# Altium PCB PCB.PcbDoc
Units mm, origin at the board's own origin, x right, y up, seen from the top; angles counter-clockwise.
Board outline 75 x 40 mm, 2 copper layers (Top Layer, Bottom Layer), stack 1.236 mm thick; 47 components, 41 nets, 179 pads, 72 vias.
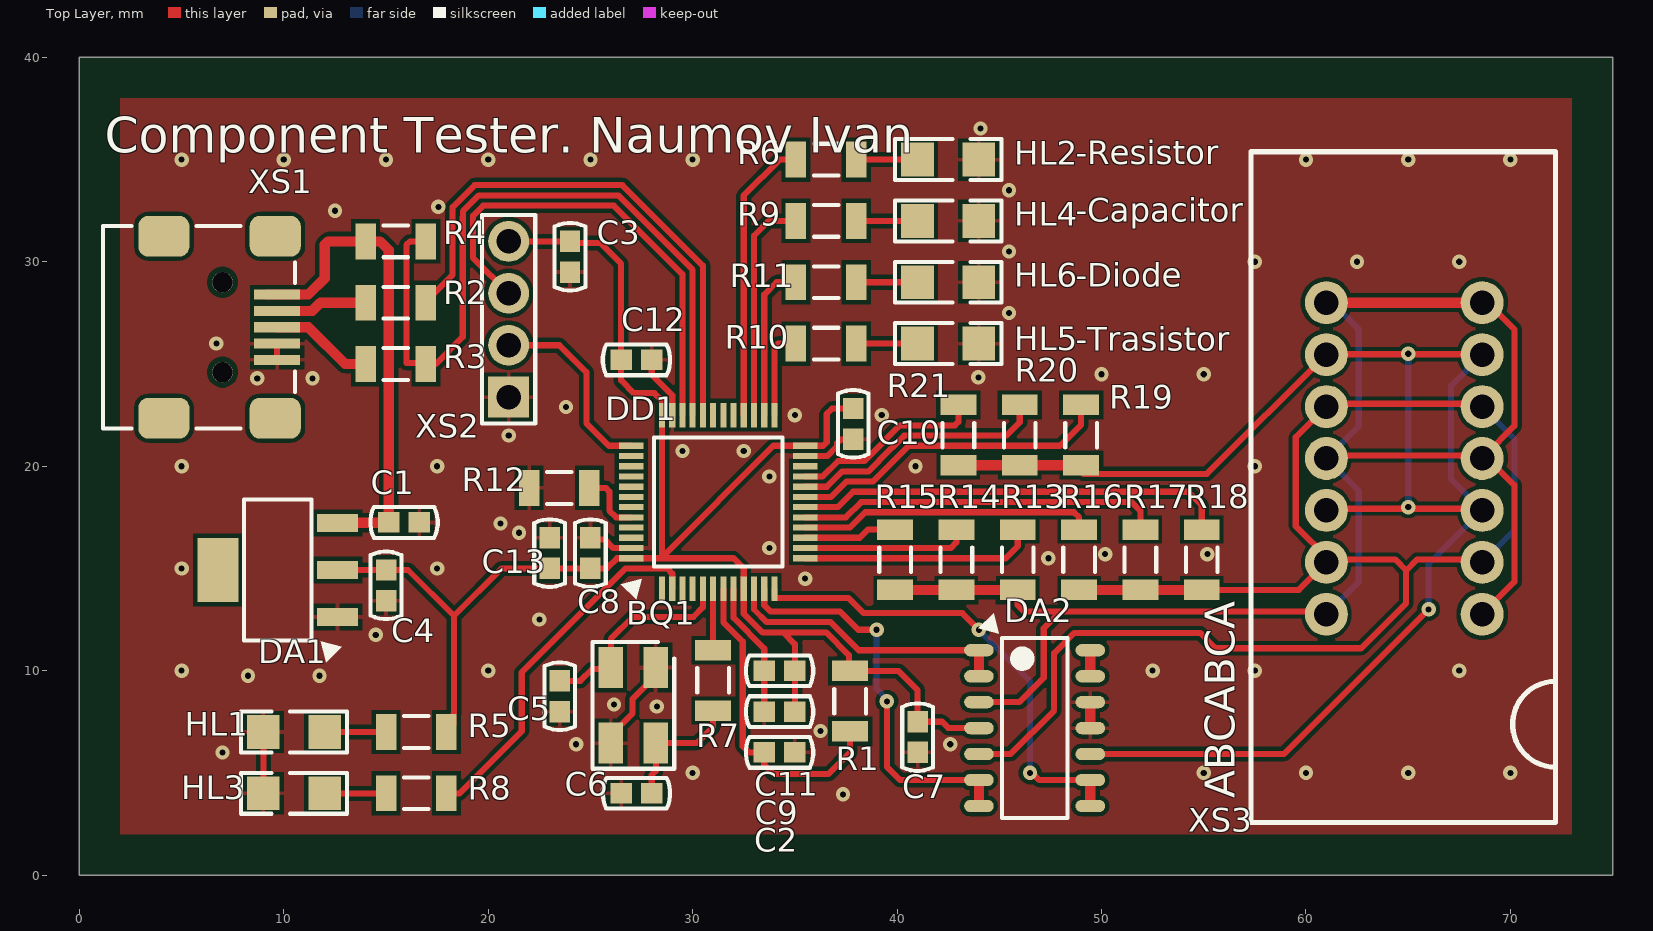
[diagram p0: Top Layer view]
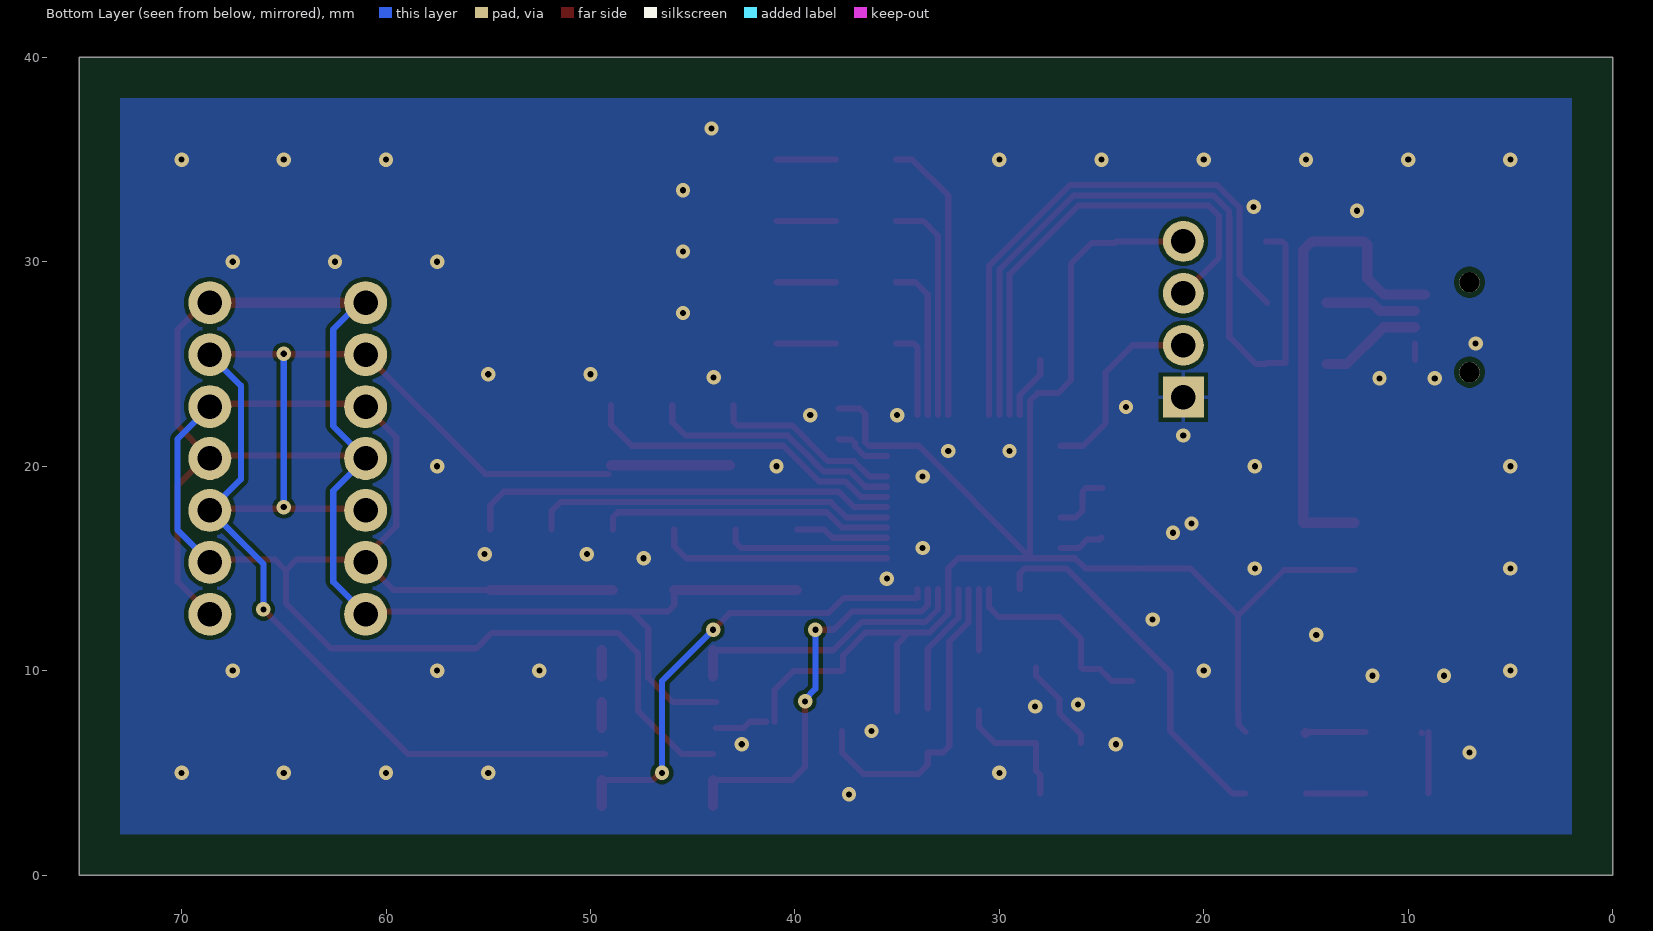
[diagram p1: Bottom Layer view, seen from below]
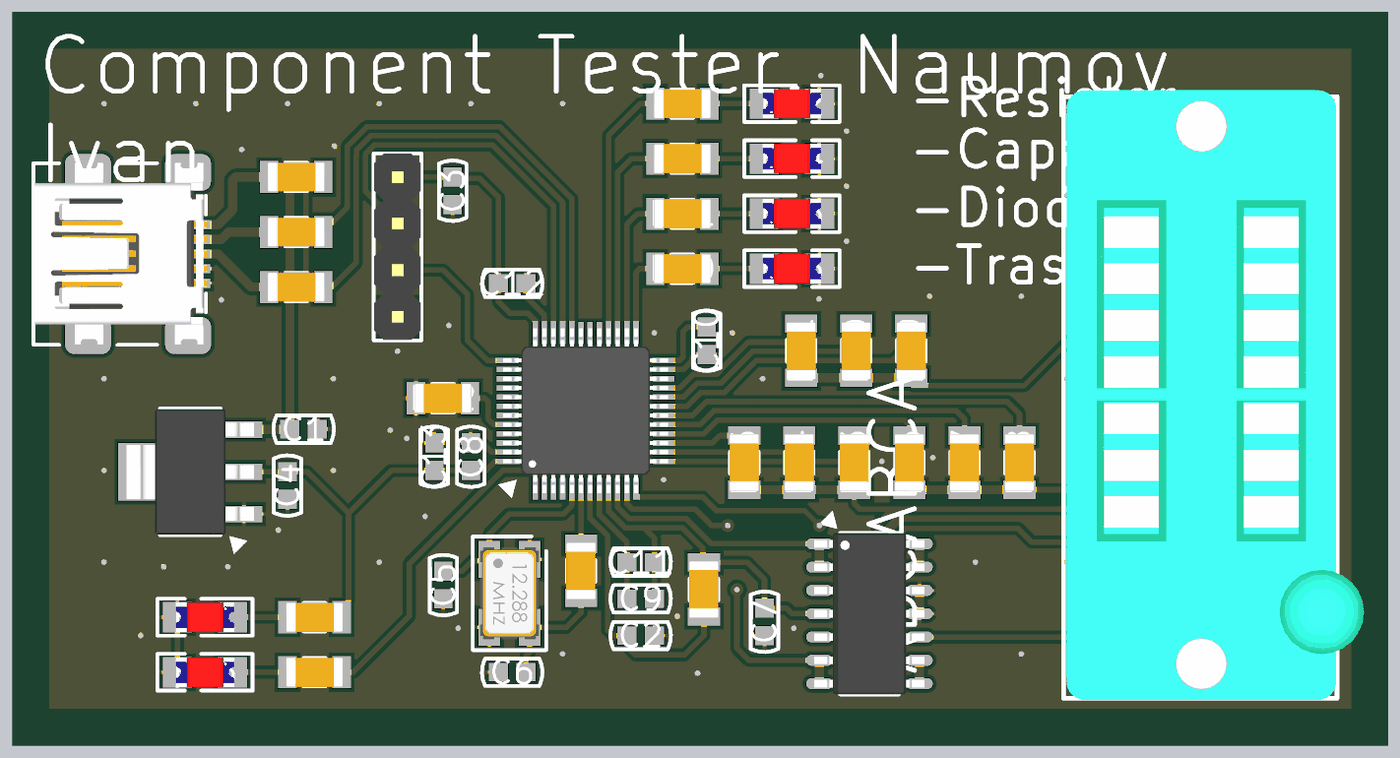
[diagram p2: 3D render of the assembled board from above, using the file's embedded part models]

## Layer stack, top to bottom
Top Solder: solder mask 0.0254, SM-002, Dk 4
Top Layer: signal copper 0.018
Dielectric 1: core 1.2, FR4, Dk 4.6
Bottom Layer: signal copper 0.018
Bottom Solder: solder mask 0.0254, SM-002, Dk 4

## Board outline
0,0 75,0 75,40 0,40

## Design rules (kind name [scope] priority, off if disabled: settings)
AcuteAngle [All] p1: minimum=3.50000000000000E+0001 checktracksonly=FALSE
BoardOutlineClearance "BoardOutlineClearance 1" [All] p1: gap=0.25 ignorepadtopadclearanceinfootprint=FALSE except(0: Arc-SplitContinuation Track-SplitContinuation SMDPad-SplitContinuation THPad-SplitContinuation Via-SplitContinuation Fill-SplitContinuation Poly-SplitContinuation Region-SplitContinuation Text-SplitContinuation) // Milling
BoardOutlineClearance "BoardOutlineClearance 2" [All] p2: gap=0.4 ignorepadtopadclearanceinfootprint=FALSE except(0: Arc-SplitContinuation Track-SplitContinuation SMDPad-SplitContinuation THPad-SplitContinuation Via-SplitContinuation Fill-SplitContinuation Poly-SplitContinuation Region-SplitContinuation Text-SplitContinuation) // V-Cut
Clearance "Clearance-1 1 Oz" [All] p1: gap=0.2 ignorepadtopadclearanceinfootprint=FALSE except(0.25: Arc-Hole Track-Hole SMDPad-Hole THPad-Hole Via-Hole Fill-Hole Poly-Hole Region-Hole Text-Hole) // Standart
DiffPairsRouting "DiffPairsRouting 1 Oz" [All] p1: maxlimit=0.254 minlimit=0.2 mostfreqgap=0.254 toplayer_minwidth=0.2 toplayer_maxwidth=0.381 toplayer_prefwidth=0.381 bottomlayer_minwidth=0.2 bottomlayer_maxwidth=0.381 bottomlayer_prefwidth=0.381 maxuncoupledlength=12.7
HoleSize "Minimum HoleSize" [IsPad] p1: absolutevalues=TRUE maxlimit=5.9 minlimit=0.6 maxpercent=80.000 minpercent=20.000
HoleSize "Minimum HoleSize VIA 1" [IsVia] p2: absolutevalues=TRUE maxlimit=5.9 minlimit=0.3 maxpercent=80.000 minpercent=20.000 // Standart
HoleSize "Minimum HoleSize VIA 2" [IsVia] p3: absolutevalues=TRUE maxlimit=5.9 minlimit=0.2 maxpercent=80.000 minpercent=20.000 // Advance
HoleToHoleClearance Hole2HoleClearance [All] p1: gap=0.25 allowstackedmicrovias=FALSE
MinimumAnnularRing "Minimum AR VIA Standart" [IsVia] p1: minimumring=0.15
MinimumAnnularRing "Minimum AR PAD Standart" [IsPAD] p2: minimumring=0.2
MinimumAnnularRing "Minimum AR VIA Advance" [IsVia] p3: minimumring=0.1
MinimumAnnularRing "Minimum AR PAD Advance" [IsPAD] p4: minimumring=0.15
MinimumSolderMaskSliver "SolderMask Bridge Standart" [All] p1: minsoldermaskwidth=0.098 // All Masks
MinimumSolderMaskSliver "SolderMask Bridge Advance" [All] p2: minsoldermaskwidth=0.1 // Mask LDI
PlaneClearance "PlaneClearance 1 Oz" [All] p1: clearance=0.2
PlaneConnect "TermalConnect-1 1 Oz" [All] p1: planeconnectstyle=Relief reliefexpansion=0.2 reliefentries=4 reliefconductorwidth=0.2 reliefairgap=0.2 // Standart
PolygonConnect "PolygonConnect-1 1 Oz" [All] p1: thpad.connectstyle=Relief thpad.reliefconductorwidth=0.2 thpad.reliefentries=4 thpad.polygonreliefangle="90 Angle" thpad.airgapwidth=0.2 smdpad.connectstyle=Relief smdpad.reliefconductorwidth=0.2 smdpad.reliefentries=4 smdpad.polygonreliefangle="90 Angle" smdpad.airgapwidth=0.2 via.connectstyle=Direct via.reliefconductorwidth=0.254 via.reliefentries=4 via.polygonreliefangle="90 Angle" via.airgapwidth=0.254 // Standart
RoutingCorners [All] p1 off: cornerstyle=45-Degree minsetback=2.54 maxsetback=2.54
RoutingVias [All] p1: holewidth=0.3 width=0.6 viastyle="Through Hole" minholewidth=0.2 minwidth=0.4 maxholewidth=5.9 maxwidth=6.4
SilkToSilkClearance Silk2SilkClearance [All] p1 off: silktosilkclearance=0.15
SilkToSolderMaskClearance Silk2SolderMaskClearance [IsPad] p1 off: minsilkscreentomaskgap=0.15 clearancetoexposedcopper=TRUE
SolderMaskExpansion SolderMaskExpansion-1 [All] p1: expansion=0.05 istentingtop=FALSE // Standart
SolderMaskExpansion "SolderMaskExpansion LDI" [All] p2: expansion=0.025 istentingtop=FALSE // Advance
UnRoutedNet [All] p1: checkbadconnections=TRUE
Width "Width 1 Oz" [All] p1: maxlimit=10 minlimit=0.15 preferedwidth=0.2 checkconnectedcopper=TRUE
20 further rules are at their usual default settings.

## Components (designator, comment, footprint, x,y, rotation, side; value= is the part's Value field where it differs from the comment)
BQ1 "8MHz" "Crystal Resonator" 27.1,8.304 r270 top
C1 "10мк" "C SMD 0603" 15.881,17.25 r0 top
C2 "1мк" "C SMD 0603" 34.25,6 r0 top
C3 "0.1мк" "C SMD 0603" 24,30.25 r270 top
C4 "22мк" "C SMD 0603" 15,14.175 r270 top
C5 "22п" "C SMD 0603" 23.5,8.75 r90 top
C6 "22п" "C SMD 0603" 27.25,4 r0 top
C7 "0.1мк" "C SMD 0603" 41,6.75 r270 top
C8 "0.1мк" "C SMD 0603" 25,15.75 r90 top
C9 "0.1мк" "C SMD 0603" 34.25,8 r180 top
C10 "0.1мк" "C SMD 0603" 37.856,22.075 r270 top
C11 "0.1мк" "C SMD 0603" 34.25,10 r180 top
C12 "1мк" "C SMD 0603" 27.25,25.2 r0 top
C13 "10мк" "C SMD 0603" 23,15.75 r90 top
DA1 "Stabilizer AMS1117-3.3" AMS1117 9.7,14.925 r180 top
DA2 "OpAmp LM358DR [SOIC-14]" SOP127P600X175-14N 46.725,7.19 r0 top
DD1 "STM32F103C8T6 [LQFP-48]" "STM32 [LQFP-48]" 31.25,18.25 r90 top
HL1 "LED" "Led 1206" 10.5,7 r180 top
HL2 "LED" "Led 1206" 42.5,35 r0 top
HL3 "LED" "Led 1206" 10.5,4 r180 top
HL4 "LED" "Led 1206" 42.5,32 r0 top
HL5 "LED" "Led 1206" 42.5,26 r0 top
HL6 "LED" "Led 1206" 42.5,29 r0 top
R1 "10к" R_SMD_1206 37.7,8.513 r270 top
R2 "20" R_SMD_1206 15.475,28 r0 top
R3 "20" R_SMD_1206 15.475,25 r0 top
R4 "4,7k" R_SMD_1206 15.475,31 r180 top
R5 "510" R_SMD_1206 16.475,7 r180 top
R6 "510" R_SMD_1206 36.525,35 r0 top
R7 "470" R_SMD_1206 31,9.525 r90 top
R8 "510" R_SMD_1206 16.475,4 r180 top
R9 "510" R_SMD_1206 36.525,32 r0 top
R10 "510" R_SMD_1206 36.525,26 r0 top
R11 "510" R_SMD_1206 36.525,29 r0 top
R12 "10к" R_SMD_1206 23.475,18.938 r0 top
R13 "0" R_SMD_1206 45.9,15.425 r90 top
R14 "680" R_SMD_1206 42.9,15.425 r90 top
R15 "470k" R_SMD_1206 39.9,15.425 r90 top
R16 "0" R_SMD_1206 48.9,15.425 r90 top
R17 "680" R_SMD_1206 51.9,15.425 r90 top
R18 "470k" R_SMD_1206 54.9,15.425 r90 top
R19 "0" R_SMD_1206 49,21.525 r90 top
R20 "680" R_SMD_1206 46,21.525 r90 top
R21 "470k" R_SMD_1206 43,21.525 r90 top
XS1 "USB_B" "USB 2.0 Type B Mini" 5.849,26.8 r90 top
XS2 "SWD" PLS-4 21,27.19 r90 top
XS3 "XS3" "ZIF 14P socket" 64.81,20.38 r90 top

## Footprints (in the part's own frame and the unit in brackets; to place one, negate y for a bottom-side part, rotate by r counter-clockwise, add the part's x,y. Pads: shape width x height; smd on the part's side, far side on the other; paste and mask are expansions set on the pad)
AMS1117 [mm] "SOT223, 4-Leads, Body 6,65x6,95mm (avg), Pitch 2,30mm, IPC Medium Density"
  rect 2x0.9 smd: 1(-2.925,-2.3) 2(-2.925,2.3) 3(-2.925,0)
  rect 2x3.15 smd: 4(2.925,0)
  silkscreen extent -3.13,-3.45 1.65,4.51, body extent -3.47,-3.42 3.48,3.42, height 1.8
"C SMD 0603" [mm] "Chip Capacitor, 2-Leads, Body 1,60x0,80mm, IPC Medium Density"
  rect 1.05x1 smd: 1(-0.75,0) 2(0.75,0)
  silkscreen extent -1.65,-0.75 1.65,0.75, body extent -0.88,-0.48 0.87,0.47, height 0.85
"Crystal Resonator" [mm] "SMD 5.0×3.2 mm"
  rect 2x1.2 smd: 1(-1.85,-1.1) 2(1.85,1.1) GND(-1.85,1.1) GND(1.85,-1.1)
  silkscreen extent -3.1,-2 3.1,2, body extent -2.5,-1.6 2.5,1.6, height 1.2
"Led 1206" [mm] "Led 1206"
  rect 1.6x1.65 smd: 1(1.5,0) 2(-1.5,0)
  silkscreen extent -2.6,-1 2.6,1, body extent -1.6,-0.8 1.6,0.8, height 1.11
PLS-4 [mm]
  rect 2x2 hole 1.2: 1(-3.81,0)
  round 2 hole 1.2: 2(-1.27,0) 3(1.27,0) 4(3.81,0)
  silkscreen extent -5.1,-1.3 5.1,1.3, body extent -5.08,-1.27 5.08,1.27, height 8.6
R_SMD_1206 [mm] "Chip Capacitor, 2-Leads, Body 3,10x1,60mm, IPC Medium Density"
  rect 1x1.75 smd: 1(-1.475,0) 2(1.475,0)
  silkscreen extent -0.6,-0.77 0.6,0.77, body extent -1.55,-0.8 1.55,0.8, height 0.55
SOP127P600X175-14N [mm] "SOP, 14-Leads, Body 8,65x3,90mm, Pitch 1,27mm, IPC Medium Density"
  oval 1.45x0.6 smd: 1(-2.725,3.81) 2(-2.725,2.54) 3(-2.725,1.27) 4(-2.725,0) 5(-2.725,-1.27) 6(-2.725,-2.54) 7(-2.725,-3.81) 8(2.725,-3.81) 9(2.725,-2.54) 10(2.725,-1.27) 11(2.725,0) 12(2.725,1.27) 13(2.725,2.54) 14(2.725,3.81)
  silkscreen extent -2.76,-4.4 1.6,5.63, body extent -3,-4.4 3,4.4, height 1.75
"STM32 [LQFP-48]" [mm]
  rect 1.2x0.3 smd: 1(-4.25,2.75) 2(-4.25,2.25) 3(-4.25,1.75) 4(-4.25,1.25) 5(-4.25,0.75) 6(-4.25,0.25) 7(-4.25,-0.25) 8(-4.25,-0.75) 9(-4.25,-1.25) 10(-4.25,-1.75) 11(-4.25,-2.25) 12(-4.25,-2.75) 25(4.25,-2.75) 26(4.25,-2.25) 27(4.25,-1.75) 28(4.25,-1.25) 29(4.25,-0.75) 30(4.25,-0.25) 31(4.25,0.25) 32(4.25,0.75) 33(4.25,1.25) 34(4.25,1.75) 35(4.25,2.25) 36(4.25,2.75)
  rect 0.3x1.2 smd: 13(-2.75,-4.25) 14(-2.25,-4.25) 15(-1.75,-4.25) 16(-1.25,-4.25) 17(-0.75,-4.25) 18(-0.25,-4.25) 19(0.25,-4.25) 20(0.75,-4.25) 21(1.25,-4.25) 22(1.75,-4.25) 23(2.25,-4.25) 24(2.75,-4.25) 37(2.75,4.25) 38(2.25,4.25) 39(1.75,4.25) 40(1.25,4.25) 41(0.75,4.25) 42(0.25,4.25) 43(-0.25,4.25) 44(-0.75,4.25) 45(-1.25,4.25) 46(-1.75,4.25) 47(-2.25,4.25) 48(-2.75,4.25)
  silkscreen extent -4.76,-3.15 3.15,4.76, body extent -4.5,-4.5 4.5,4.5, height 1.6
"USB 2.0 Type B Mini" [mm] "USB 2.0 Type B Mini"
  rect 0.5x2.25 smd: 1(1.6,-3.826) 2(0.8,-3.826) 3(0,-3.826) 4(-0.8,-3.826) 5(-1.6,-3.826)
  round 1 hole 1 unplated: M(-2.2,-1.151) M(2.2,-1.151)
  rrect50% 2x2.5 smd: S(-4.45,-3.731) S(-4.45,1.719) S(4.45,-3.731) S(4.45,1.719)
  silkscreen extent -4.95,-4.71 4.95,4.69, body extent -4.93,-4.76 4.97,4.64, height 3.95
"ZIF 14P socket" [mm] "For componrnt tester"
  round 2.1 hole 1.2: 1(-7.62,-3.81) 1(-7.62,3.81) 1(0,-3.81) 1(0,3.81) 1(7.62,-3.81) 1(7.62,3.81) 2(-5.08,-3.81) 2(-5.08,3.81) 2(2.54,3.81) 2(2.54,-3.81) 3(-2.54,3.81) 3(-2.54,-3.81) 3(5.08,-3.81) 3(5.08,3.81)
  silkscreen extent -17.8,-7.4 15,7.5, body extent -17.9,-8.87 15.35,7.34, height 25.2

## Part data
BQ1: library part "Quartz resonator"
C1 C2 C3 C4 C5 C6 C7 C8 C9 C10 C11 C12 C13: library part C
DD1: "32bit MCU ARM Cortex-M3 72MHz"
R1 R2 R3 R4 R5 R6 R7 R8 R9 R10 R11 R12 R13 R14 R15 R16 R17 R18 R19 R20 R21: library part R
XS1: library part USB
XS2: library part XS_SWD

## Via types
v1: diameter 0.7, hole 0.3, Top Layer to Bottom Layer, tented both sides, 72 vias

## Nets (pads, with @x,y where several pads share a name; then routed paths per layer and width w, separated by ;. In a path a pad name is that pad's centre, name@x,y a point inside that pad or via, vN(x,y) a via of type N, cw(c..) or ccw(c..) an arc to the next point about the centre after c; other vN are vias at no path point)
+3.3: C3.1 C4.1 C7.1 C8.1 C9.1 C10.1 C11.1 C12.1 C13.1 DA1.3 DA2.4 DD1.9 DD1.24 DD1.36 DD1.48 R1.1 R5.1 XS2.4 | length 83.5
  Top Layer w0.3: DA1.3 C4.1 16.075,14.925 18.325,12.675 ; R5.1 18.3,7.35 18.3,7.876 18.325,7.901 18.325,12.675 ; XS2.4 C3.1@24.302,31 ; C13.1 20.65,15 18.325,12.675 ; C13.1@23.15,15 C8.1 25.8,15 26.3,15.5 DD1.48 32,15.5 32.5,15 DD1.9 32.5,12.786 33.411,11.875 34.425,11.875 ; C3.1@24.31,30.924 25.476,30.924 26.5,29.9 C12.1 26.5,24.2 27.125,23.575 28.125,23.575 28.5,23.2 DD1.36 28.5,15.7 28.575,15.625 33.95,21 DD1.24 36.384,21 36.56,21.176 36.56,22.56 36.825,22.825 C10.1 ; C9.1 C11.1 35,11.3 34.425,11.875 ; C7.1 41,9.05 40.062,9.988 R1.1 37.638,10.049 37.638,10.762 36.525,11.875 34.425,11.875 ; C7.1@41.4,7.5 42.2,7.5 42.5,7.2 43.836,7.2 DA2.4@43.846,7.19
+5: C1.1 DA1.1 R4.2 XS1.1 | length 24
  Top Layer w0.5: XS1.1@9.175,28.4 XS1.1 11.2,28.4 12,29.2 12,30.832 12.168,31 R4.2 14.707,31 15.131,30.576 C1.1 15.119,17.237 12.637,17.237 DA1.1
ADC1: DA2.1 DA2.2 DD1.10 | length 13.9
  Top Layer w0.3: DD1.10 33,12.993 33.618,12.375 36.75,12.375 38.125,11 DA2.1@43.846,11
  Top Layer w0.5: DA2.2 DA2.1
ADC2: DA2.6 DA2.7 DD1.11 | length 19.6
  Top Layer w0.3: DD1.11 33.5,13.2 33.8,12.9 37.197,12.9 38.097,12 v1(39,12) ; v1(39.5,8.5) 39.5,5.3 40.15,4.65 DA2.6@43.846,4.65
  Top Layer w0.5: DA2.7 DA2.6
  Bottom Layer w0.3: v1(39,12) 39,9.108 39.5,8.608 v1(39.5,8.5)
ADC3: DA2.8 DA2.9 DD1.12 | length 23.3
  Top Layer w0.3: DD1.12 34,13.55 37.63,13.55 38.367,12.813 43.187,12.813 v1(44,12) ; v1(46.5,5) 46.608,5 46.958,4.65 DA2.9@49.296,4.65
  Top Layer w0.5: DA2.8 DA2.9
  Bottom Layer w0.3: v1(44,12) 46.5,9.5 v1(46.5,5)
GND: BQ1.GND C1.2 C2.2 C3.2 C4.2 C5.1 C6.1 C7.2 C8.2 C9.2 C10.2 C11.2 C12.2 C13.2 DA1.2 DA2.11 DA2.12 DD1.8 DD1.23 DD1.35 DD1.47 HL1.1 HL2.1 HL3.1 HL4.1 HL5.1 HL6.1 R12.1 XS1.4 XS1.5 XS2.1 | length 24.3
  Top Layer w0.3: HL3.1 HL1.1 ; HL1.1@9.331,6.95 HL1.1@9.35,6.969 ; XS1.5 XS1.4 ; C8.2 25.075,16.425 25.7,16.425 26.125,16 DD1.47 ; BQ1.GND@26,6.454 26,6.854 27.05,7.904 27.05,8.604 28.2,9.754 BQ1.GND@28.2,10.154 ; C12.2 28,24.476 29,23.476 DD1.35 ; DD1.8 32,12.579 33.5,11.079 C11.2 C9.2@33.5,8.149 ; DD1.23 36.591,20.5 37.06,20.969 37.06,21.124 37.235,21.3 37.831,21.3 C10.2
  Top Layer w0.5: DA2.11 DA2.12
  other v1: 37.35,3.95 30,5 55,5 60,5 65,5 70,5 7,6 24.3,6.4 42.6,6.4 36.25,7.05 28.25,8.25 26.15,8.35 8.25,9.75 11.75,9.75 5,10 20,10 52.5,10 57.5,10 67.5,10 14.5,11.75 22.5,12.5 35.5,14.5 5,15 17.5,15 47.4,15.5 50.175,15.7 55.175,15.7 33.75,16 21.5,16.75 20.6,17.2 33.75,19.5 5,20 17.5,20 40.9,20 57.5,20 29.5,20.75 32.5,20.75 21,21.5 35,22.5 39.25,22.5 23.8,22.9 8.7,24.3 11.4,24.3 43.975,24.35 50,24.5 55,24.5 6.7,26 45.475,27.5 57.5,30 62.5,30 67.5,30 45.475,30.5 12.5,32.5 17.56,32.688 45.475,33.5 5,35 10,35 15,35 20,35 25,35 30,35 60,35 65,35 70,35 44.075,36.525
LED1: DD1.28 R6.1 | length 14
  Top Layer w0.3: DD1.28 32.5,33.25 34.25,35 R6.1
LED2: DD1.27 R9.1 | length 11.1
  Top Layer w0.3: DD1.27 33,31.275 33.725,32 R9.1
LED3: DD1.26 R11.1 | length 7.7
  Top Layer w0.3: DD1.26 33.5,28.4 34.1,29 R11.1
LED4: DD1.25 R10.1 | length 4.4
  Top Layer w0.3: DD1.25 34,25.824 34.176,26 R10.1
NetBQ1_2: BQ1.2 C6.2 R7.1 | length 6.5
  Top Layer w0.3: C6.2 28,4.9 28.2,5.1 BQ1.2 30.204,6.454 31,7.25 R7.1
NetDA2_13: DA2.13 DA2.14 | length 1.3
  Top Layer w0.5: DA2.13 DA2.14
NetDD1_44: DD1.44 R12.2 | length 3.2
  Top Layer w0.3: R12.2 25.749,18.938 25.925,18.762 25.925,17.83 26.255,17.5 DD1.44
NetHL1_2: HL1.2 R5.2 | length 2.9
  Top Layer w0.3: HL1.2@12.1,7 R5.2
  Top Layer w0.5: R5.2@15,6.95 R5.2@15.01,6.95
NetHL2_2: HL2.2 R6.2 | length 2.9
  Top Layer w0.3: R6.2 HL2.2@40.9,35
NetHL3_2: HL3.2 R8.2 | length 2.9
  Top Layer w0.3: HL3.2@12.1,4 R8.2
NetHL4_2: HL4.2 R9.2 | length 2.9
  Top Layer w0.3: R9.2 HL4.2@40.9,32
NetHL5_2: HL5.2 R10.2 | length 2.9
  Top Layer w0.3: R10.2 HL5.2@40.9,26
NetHL6_2: HL6.2 R11.2 | length 2.9
  Top Layer w0.3: R11.2 HL6.2@40.9,29
NetR2_1: R2.1 XS1.2 | length 4.5
  Top Layer w0.5: XS1.2 11.39,27.6 11.79,28 R2.1
NetR3_1: R3.1 XS1.3 | length 5.1
  Top Layer w0.5: XS1.3 11.2,26.8 13,25 R3.1
NRST: C2.1 DD1.7 R1.2 | length 15.7
  Top Layer w0.3: DD1.7 31.5,12.372 32.45,11.422 32.45,6.3 32.75,6 C2.1 33.5,5.401 33.951,4.95 36.65,4.95 37.7,6 R1.2
OSCIN: BQ1.1 C5.2 DD1.5 | length 10.2
  Top Layer w0.3: C5.2 24.5,9.5 25.075,10.075 25.921,10.075 BQ1.1 26,11.55 27.075,12.625 30.025,12.625 30.5,13.1 DD1.5
OSCOUT: DD1.6 R7.2 | length 3
  Top Layer w0.3: R7.2 DD1.6
PA3: DD1.13 R13.2 | length 11.5
  Top Layer w0.3: DD1.13 45.31,15.5 45.9,16.09 R13.2
PA4: DD1.14 R14.2 | length 8.1
  Top Layer w0.3: DD1.14 37.7,16 42.624,16 42.9,16.276 R14.2
PA5: DD1.15 R15.2 | length 4.6
  Top Layer w0.3: DD1.15 38.175,16.5 38.575,16.9 R15.2
PA6: DD1.16 R16.2 | length 14.4
  Top Layer w0.3: DD1.16 37.693,17 38.443,17.75 48.65,17.75 48.9,17.5 R16.2
PA7: DD1.17 R17.2 | length 17.8
  Top Layer w0.3: DD1.17 37.486,17.5 38.236,18.25 51.474,18.25 51.9,17.824 R17.2
PA11: DD1.32 R2.2 | length 26.9
  Top Layer w0.3: R2.2@16.9,28 18.25,29.35 18.25,32.388 18.26,32.398 18.26,32.674 19.336,33.75 19.836,33.75 26.564,33.75 30.5,29.814 DD1.32
PA12: DD1.33 R3.2 R4.1 | length 36.4
  Top Layer w0.3: R4.1 16.176,31 16,30.824 16,25.05 16.9,25.05 R3.2 17.425,25 18.75,26.325 18.75,32.181 18.76,32.191 18.76,32.467 19.543,33.25 20.043,33.25 26.357,33.25 30,29.607 DD1.33
PB0: DD1.18 R18.2 | length 21.2
  Top Layer w0.3: DD1.18 37.096,18 37.846,18.75 54.25,18.75 54.9,18.1 R18.2
PB1: DD1.19 R19.2 | length 15.9
  Top Layer w0.3: DD1.19 36.773,18.5 37.523,19.25 38.815,19.25 40.553,20.988 40.553,21 47.975,21 49,22.025 R19.2
PB2: DD1.20 R20.2 | length 12.7
  Top Layer w0.3: DD1.20 36.566,19 37.316,19.75 38.608,19.75 39.106,20.248 39.106,20.26 40.346,21.5 45.35,21.5 46,22.15 R20.2
PB10: DD1.21 R21.2 | length 9.4
  Top Layer w0.3: DD1.21 36.359,19.5 37.109,20.25 38.401,20.25 38.606,20.455 38.606,20.467 40.139,22 42.825,22 43,22.175 R21.2
PC13: DD1.2 R8.1 | length 18.1
  Top Layer w0.3: R8.1 18.599,4 21.637,7.038 21.637,9.913 26.725,15 28.745,15 29,14.745 DD1.2
SWCLK: DD1.37 XS2.2 | length 9.5
  Top Layer w0.3: XS2.2 23.48,25.92 24.8,24.6 24.8,22.1 25.9,21 DD1.37
SWIO: DD1.34 XS2.3 | length 23.3
  Top Layer w0.3: XS2.3 19.25,30.21 19.25,31.974 19.26,31.984 19.26,32.26 19.75,32.75 26.15,32.75 29.5,29.4 DD1.34
"Вход A": DA2.3 R13.1 R14.1 R15.1 XS3.1 | length 80.1
  Top Layer w0.3: DA2.3@43.846,8.46 45.979,8.46 47.175,9.656 47.175,12.075 48,12.9 ; R13.1 45.9,13.2 46.2,12.9 48,12.9 ; XS3.1@61.13,12.9 48,12.9 ; XS3.1@61.13,20.52 XS3.1@68.75,20.52 ; XS3.1@68.75,12.9 70.2,14.35 70.2,19.07 XS3.1@68.75,20.52 ; XS3.1@68.755,28.135 70.2,26.69 70.2,21.97 XS3.1@68.75,20.52
  Top Layer w0.5: R15.1 R14.1 R13.1 ; XS3.1@61,28 XS3.1@68.62,28
  Bottom Layer w0.3: XS3.1@61,12.76 62.58,14.34 62.58,18.8 XS3.1@61,20.38 ; XS3.1@61.13,28.14 62.58,26.69 62.58,21.96 XS3.1@61.135,20.515
"Вход B": DA2.5 R16.1 R17.1 R18.1 XS3.2 | length 74.1
  Top Layer w0.3: DA2.5 45.545,5.92 47.675,8.05 47.675,10.85 48.675,11.85 54.823,11.85 55.573,11.1 62.7,11.1 64.9,13.3 64.9,14.9 ; R18.1 59.65,13.95 XS3.2@61,15.3 ; XS3.2@68.75,15.44 65.44,15.44 64.9,14.9 ; XS3.2@68.75,23.06 61.13,23.06 59.5,21.43 59.5,17.07 61.13,15.44 64.36,15.44 64.9,14.9
  Top Layer w0.5: R16.1 R17.1 R18.1
  Bottom Layer w0.3: XS3.2@68.62,15.3 70.2,16.88 70.2,21.34 XS3.2@68.62,22.92 ; XS3.2@68.75,23.06 XS3.2@68.755,23.055
"Вход C": DA2.10 R19.1 R20.1 R21.1 XS3.3 | length 77.4
  Top Layer w0.3: R19.1@49.125,19.625 55.155,19.625 XS3.3@60.995,25.465 ; DA2.10@49.296,5.92 DA2.10 58.92,5.92 v1(66,13) ; XS3.3@61,25.46 61.02,25.48 64.98,25.48 v1(65,25.5) 65.02,25.48 68.6,25.48 XS3.3@68.62,25.46 ; XS3.3@61.13,17.98 61.187,17.923 64.923,17.923 v1(65,18) 65.077,17.923 68.693,17.923 XS3.3@68.75,17.98
  Top Layer w0.5: R21.1@43.175,20.05 R19.1
  Bottom Layer w0.3: v1(65,18) v1(65,25.5) ; v1(66,13) 66,15.22 68.62,17.84 67.1,19.36 67.1,23.94 XS3.3@68.62,25.46
pads on no net: DA1.4 DD1.1 DD1.3 DD1.4 DD1.22 DD1.29 DD1.30 DD1.31 DD1.38 DD1.39 DD1.40 DD1.41 DD1.42 DD1.43 DD1.45 DD1.46 XS1.M XS1.S

## Polygon pours and split planes (outlines as drawn)
GND on Bottom Layer "GND_L02_P001" (solid, pour order 1): 2,38 2,2 73,2 73,38
GND on Top Layer "GND_L01_P000" (solid, pour order 0): 2,38 73,38 73,2 2,2

## Silkscreen, mask and mechanical layers (free items; w line width, h text height)
Top Overlay:
  text "Component Tester. Naumov Ivan" at 1.25,34.75 h3
  text "-Resistor" at 48.75,34.37 h2
  text "-Capacitor" at 48.75,31.567 h2
  text "-Diode" at 48.75,28.388 h2
  text "-Trasistor" at 48.75,25.25 h2
  text "ABCABCA" at 57,3.75 h2.5 r90
Drill Drawing:
  circle w0.254: c6.306,59.01 r0.847
  lines w0.254: 5.459,50.543 6.306,50.967 7.153,50.543 6.729,51.39 7.153,52.237 6.306,51.813 5.459,52.237 5.883,51.39 5.459,50.543 ; 5.459,54.353 7.153,54.353 7.153,56.047 5.459,56.047 5.459,54.353
  lines w0.381: 3.941,49.4 269.907,49.4 ; 3.941,60.83 269.907,60.83 ; 17.933,45.59 17.933,64.64 ; 31.645,45.59 31.645,64.64 ; 59.323,45.59 59.323,64.64 ; 72.172,45.59 72.172,64.64 ; 90.811,45.59 90.811,64.64 ; 128.9,45.59 128.9,64.64 ; 143.882,45.59 143.882,64.64 ; 162.825,45.59 162.825,64.64 ; 179.331,45.59 179.331,64.64 ; 201.016,45.59 201.016,64.64 ; 234.89,45.59 234.89,64.64 ; 3.941,45.59 269.907,45.59 269.907,64.64 3.941,64.64 3.941,45.59
  text "Symbol" at 6.227,61.973 h1.83
  text "Count" at 19.076,61.973 h1.83
  text "Hole Size" at 32.788,61.973 h1.83
  text "Plated" at 60.466,61.973 h1.83
  text "Hole Type" at 73.315,61.973 h1.83
  text "Drill Layer Pair" at 91.954,61.973 h1.83
  text "Via/Pad" at 130.043,61.973 h1.83
  text "Pad Shape" at 145.025,61.973 h1.83
  text "Template" at 163.968,61.973 h1.83
  text "Description" at 180.474,61.973 h1.83
  text "Hole Tolerance (+)" at 202.159,61.973 h1.83
  text "Hole Tolerance (-)" at 236.033,61.973 h1.83
  text "2" at 19.076,58.163 h1.52
  text "1.000mm (39.37mil)" at 32.788,58.163 h1.52
  text "NPTH" at 60.466,58.163 h1.52
  text "Round" at 73.315,58.163 h1.52
  text "Top Layer - Bottom Layer" at 91.954,58.163 h1.52
  text "Pad" at 130.043,58.163 h1.52
  text "Rounded" at 145.025,58.163 h1.52
  text "c100hn100" at 163.968,58.163 h1.52
  text "18" at 19.076,54.353 h1.52
  text "1.200mm (47.24mil)" at 32.788,54.353 h1.52
  text "PTH" at 60.466,54.353 h1.52
  text "Round" at 73.315,54.353 h1.52
  text "Top Layer - Bottom Layer" at 91.954,54.353 h1.52
  text "Pad" at 130.043,54.353 h1.52
  text "(Mixed)" at 145.025,54.353 h1.52
  text "(Mixed)" at 163.968,54.353 h1.52
  text "72" at 19.076,50.543 h1.52
  text "0.300mm (11.81mil)" at 32.788,50.543 h1.52
  text "PTH" at 60.466,50.543 h1.52
  text "Round" at 73.315,50.543 h1.52
  text "Top Layer - Bottom Layer" at 91.954,50.543 h1.52
  text "Via" at 130.043,50.543 h1.52
  text "Rounded" at 145.025,50.543 h1.52
  text "(Mixed)" at 163.968,50.543 h1.52
  text "92 Total" at 19.076,46.733 h1.52